# Altium PCB Amplificador.PcbDoc
Units mm, origin at the board's own origin, x right, y up, seen from the top; angles counter-clockwise.
Board outline 40 x 45 mm, 2 copper layers (Top Layer, Bottom Layer), stack 1.671 mm thick; 12 components, 6 nets, 39 pads, 5 vias.
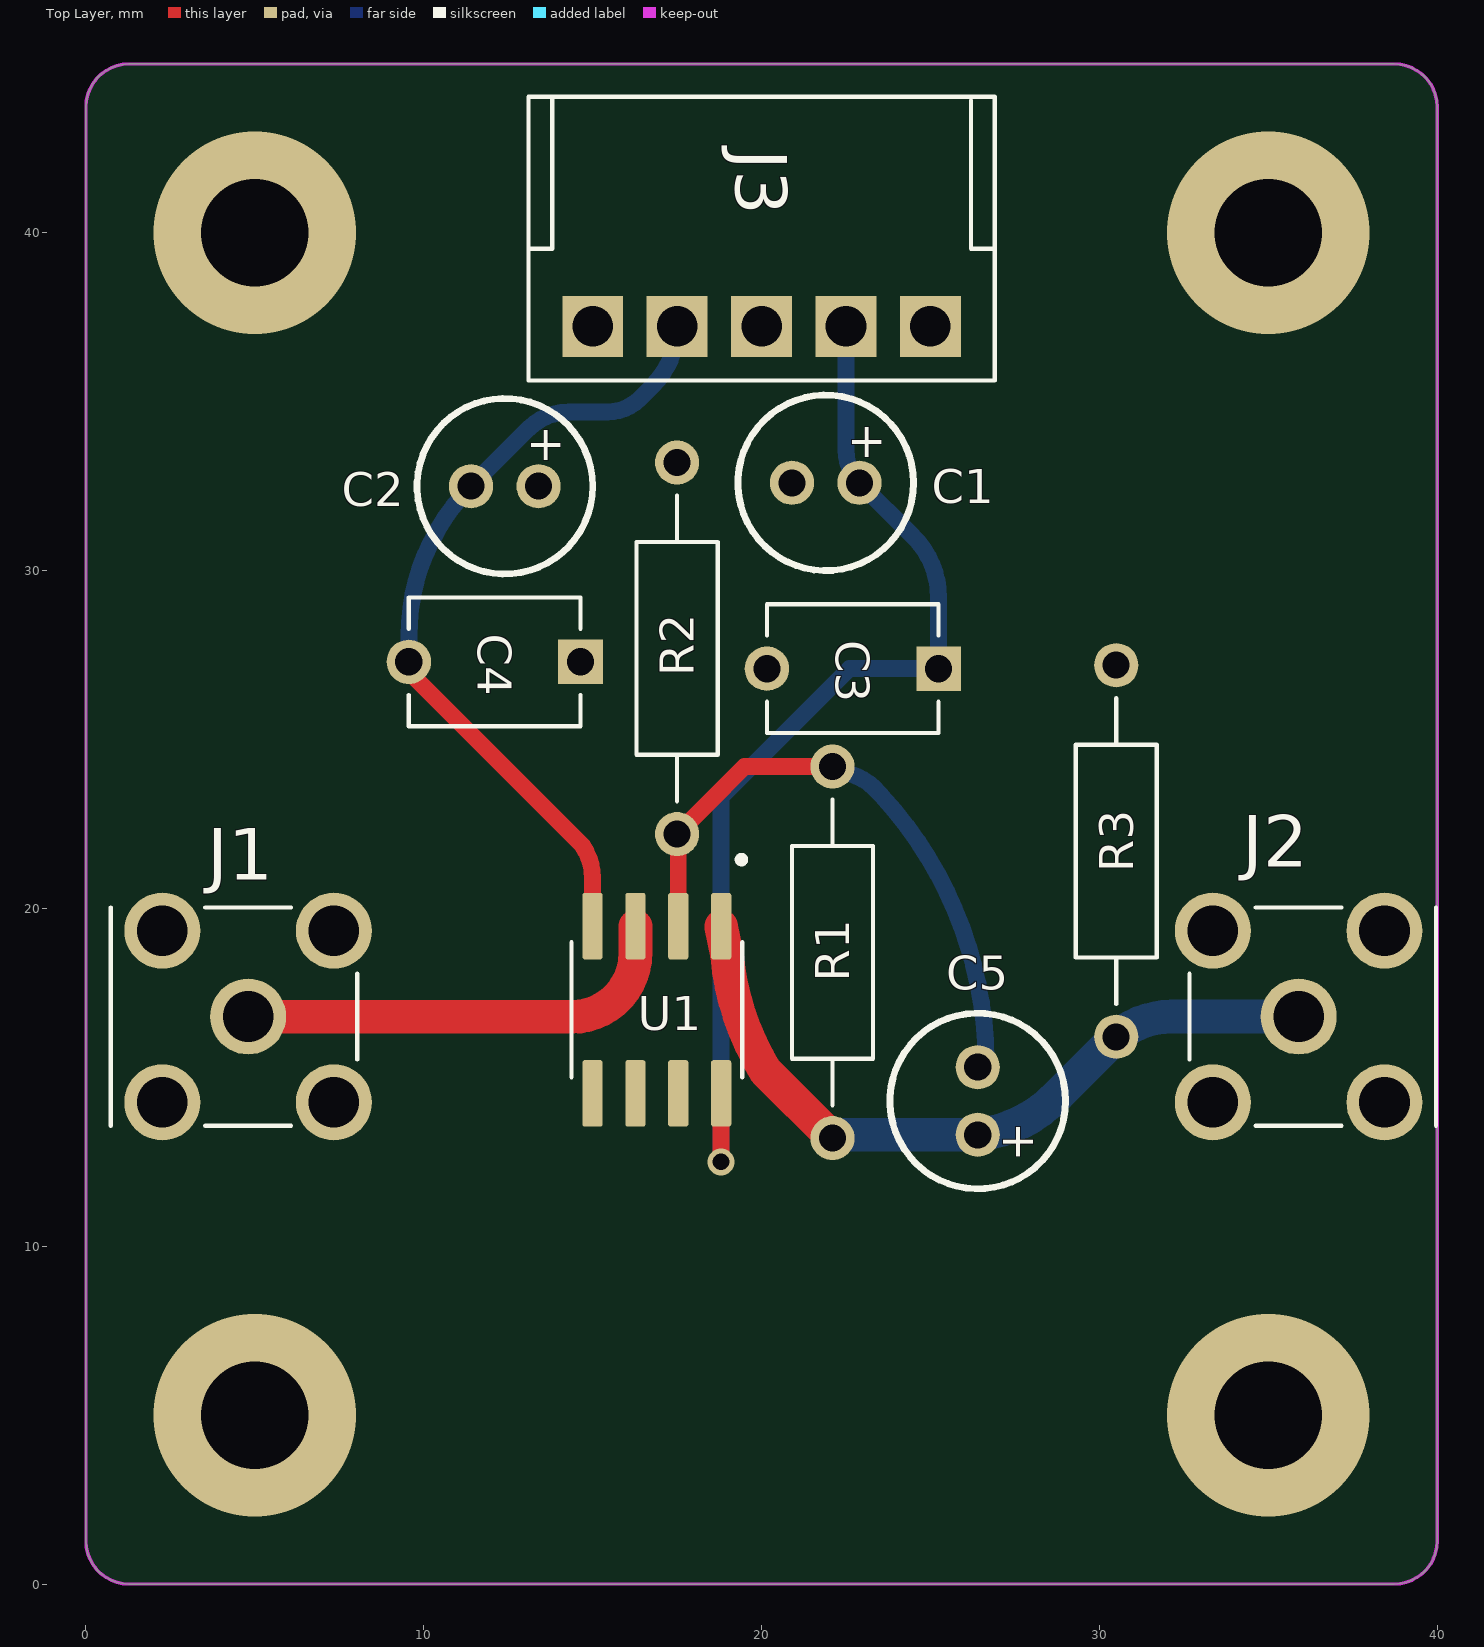
[diagram p0: Top Layer view]
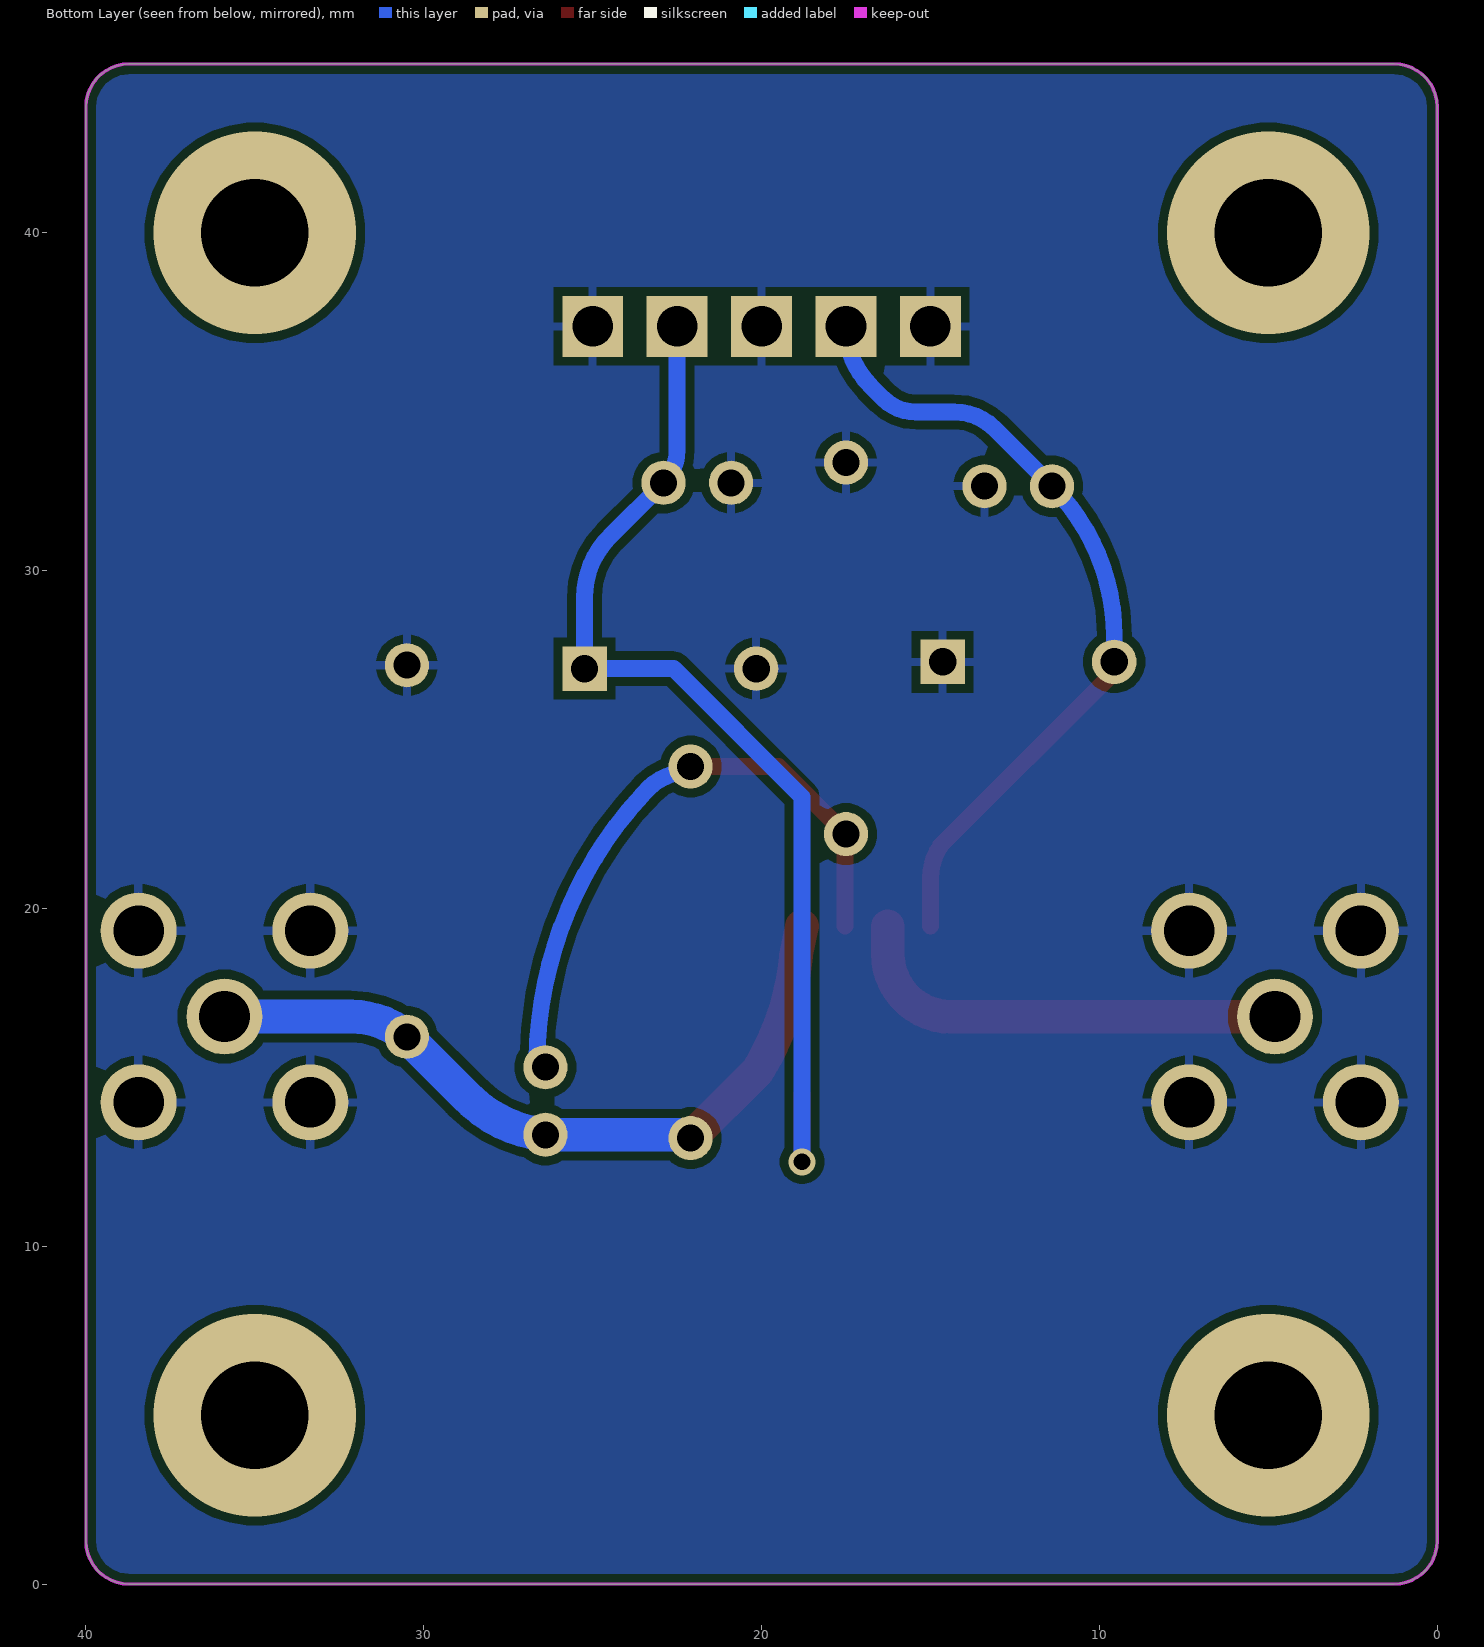
[diagram p1: Bottom Layer view, seen from below]
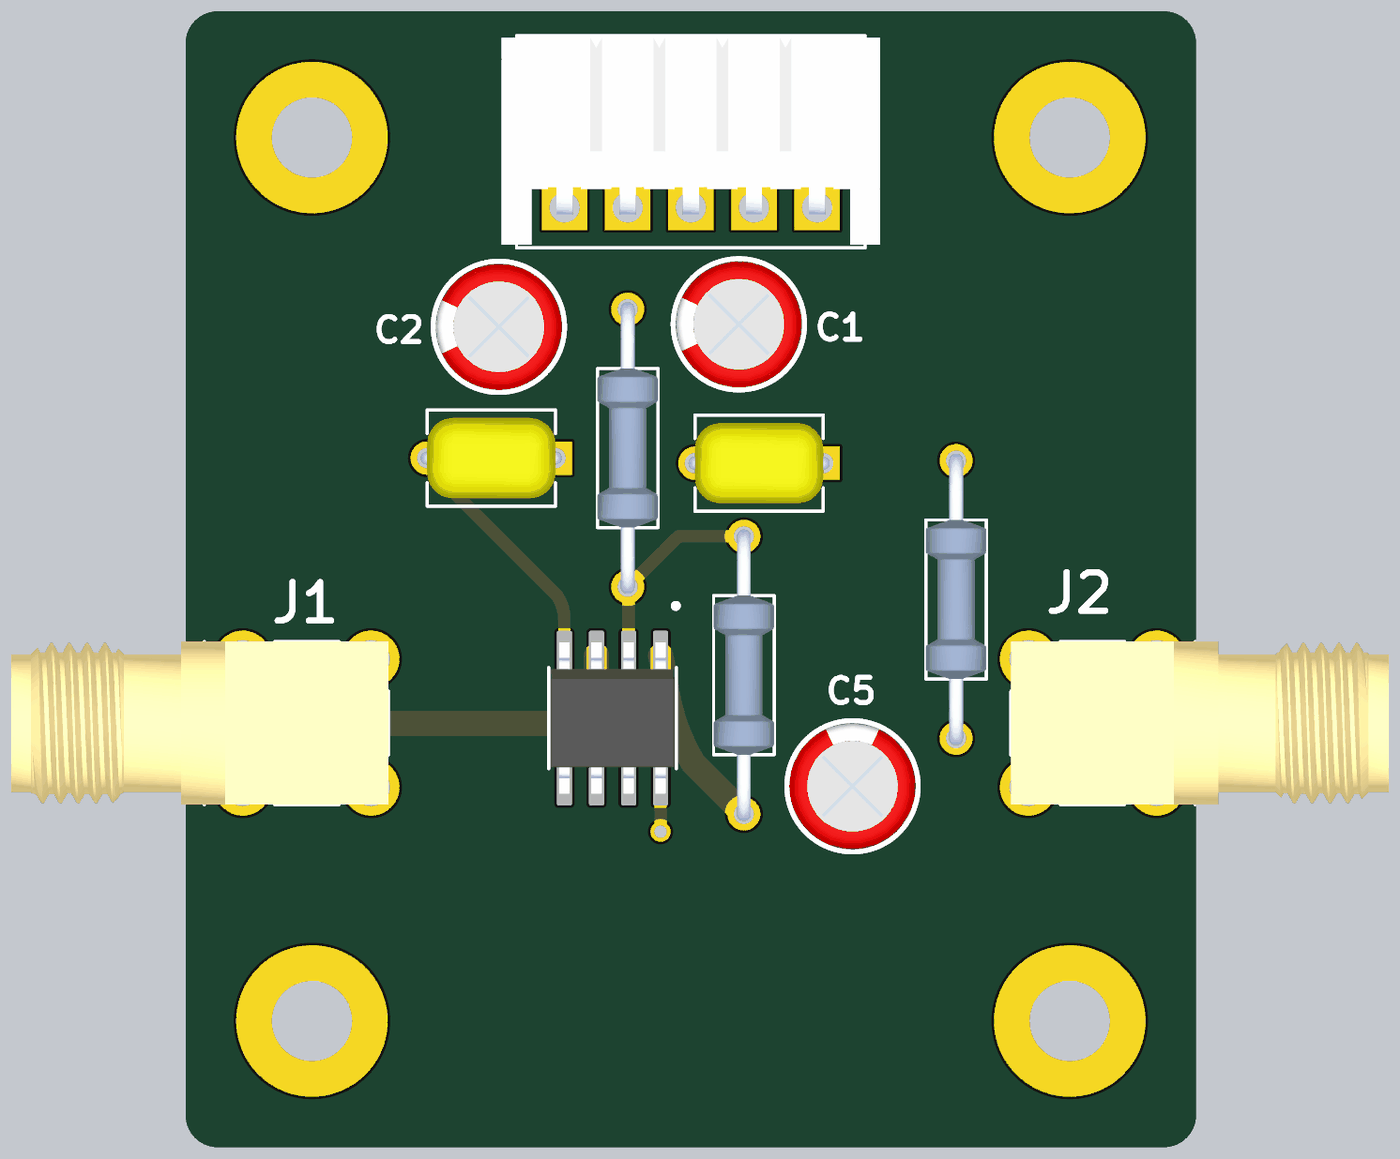
[diagram p2: 3D render of the assembled board from above, using the file's embedded part models]

## Layer stack, top to bottom
Top Solder: solder mask 0.0102, Solder Resist, Dk 3.5
Top Layer: signal copper 0.0356
Dielectric 1: dielectric 1.6, FR-4, Dk 4.2
Bottom Layer: signal copper 0.0356
Bottom Solder: solder mask 0.0102, Solder Resist, Dk 3.5

## Board outline
0,1.27 0,43.73 cw(c1.27,43.73) 1.27,45 38.73,45 cw(c38.73,43.73) 40,43.73 40,1.27 cw(c38.73,1.27) 38.73,0 1.27,0 cw(c1.27,1.27)

## Design rules (kind name [scope] priority, off if disabled: settings)
Clearance [All] p1: gap=0.254 ignorepadtopadclearanceinfootprint=FALSE
PolygonConnect ReliefAncho [IsPad And InPadClass('ReliefAncho')] p1: thpad.connectstyle=Relief thpad.reliefconductorwidth=0.254 thpad.reliefentries=4 thpad.polygonreliefangle="90 Angle" thpad.airgapwidth=0.254 smdpad.connectstyle=Relief smdpad.reliefconductorwidth=1.2 smdpad.reliefentries=4 smdpad.polygonreliefangle="90 Angle" smdpad.airgapwidth=0.3 via.connectstyle=Relief via.reliefconductorwidth=0.254 via.reliefentries=4 via.polygonreliefangle="90 Angle" via.airgapwidth=0.254
PolygonConnect DirectConnect [IsPad And InPadClass('DirectConnect')] p2: connectstyle=Direct reliefconductorwidth=0.254 reliefentries=4 polygonreliefangle="90 Angle" airgapwidth=0.254
PolygonConnect Vias_Shielding_DC [All vs InNet('GND')] p3: thpad.connectstyle=Relief thpad.reliefconductorwidth=0.254 thpad.reliefentries=4 thpad.polygonreliefangle="90 Angle" thpad.airgapwidth=0.254 smdpad.connectstyle=Relief smdpad.reliefconductorwidth=0.254 smdpad.reliefentries=4 smdpad.polygonreliefangle="90 Angle" smdpad.airgapwidth=0.254 via.connectstyle=Direct via.reliefconductorwidth=0.254 via.reliefentries=4 via.polygonreliefangle="90 Angle" via.airgapwidth=0.254
PolygonConnect [All] p4: connectstyle=Relief reliefconductorwidth=0.254 reliefentries=4 polygonreliefangle="90 Angle" airgapwidth=0.254
RoutingVias [All] p1: holewidth=0.711 width=1.27 viastyle="Through Hole" minholewidth=0.1 minwidth=0.1 maxholewidth=0.711 maxwidth=5
SolderMaskExpansion [All] p1: expansion=0.102 istentingtop=FALSE
SupplyNets "Schematic Supply Nets" [InNet('GND')] p1: voltage=0.000
Width [All] p1: maxlimit=10 minlimit=0.254 preferedwidth=0.254
30 further rules are at their usual default settings.

## Components (designator, comment, footprint, x,y, rotation, side; value= is the part's Value field where it differs from the comment)
C1 "10uF" WCAP-ATG5_5X11(DXL) 21.9,32.6 r0 top
C2 "10uF" WCAP-ATG5_5X11(DXL) 12.4,32.5 r0 top
C3 "10nF" CAPRR508W54L508T381H660 22.7,27.1 r180 top
C4 "10nF" CAPRR508W54L508T381H660 12.1,27.3 r180 top
C5 "10uF" WCAP-ATG5_5X11(DXL) 26.4,14.3 r270 top
J1 "F SMA" HUBER+SUHNER_85201239 4.8,16.8 r270 top
J2 "F SMA" HUBER+SUHNER_85201239 35.9,16.8 r90 top
J3 "S5B-EH" JST_S5B-EH 20,41 r180 top
R1 "10kΩ" RESAD1100W55L630D240B 22.1,18.7 r270 top
R2 "1kΩ" PCBComponent_1 17.5,27.7 r270 top
R3 "1kΩ" PCBComponent_1 30.5,21.7 r90 top
U1 "LT6201IS8#PBF" SOIC127P600X175-8N 16.9,17 r270 top

## Footprints (in the part's own frame and the unit in brackets; to place one, negate y for a bottom-side part, rotate by r counter-clockwise, add the part's x,y. Pads: shape width x height; smd on the part's side, far side on the other; paste and mask are expansions set on the pad)
CAPRR508W54L508T381H660 [mm]
  rect 1.318x1.318 / inner round 1.318 / far side rect 1.318x1.318 hole 0.81: 1(-2.54,0)
  round 1.318 hole 0.81: 2(2.54,0)
  silkscreen extent -2.54,-1.91 2.54,1.9, body extent -2.8,-1.59 2.8,1.59, height 6.6
HUBER+SUHNER_85201239 [mm]
  round 2.25 hole 1.5: 1(0,0) G1(-2.54,2.54) G2(2.54,2.54) G3(-2.54,-2.54) G4(2.54,-2.54)
  silkscreen extent -3.23,-4.06 3.23,3.23, body extent -3.23,-11.73 3.23,3.23, height 9.75
JST_S5B-EH [mm]
  rect 1.8x1.8 / inner round 1.8 / far side rect 1.8x1.8 hole 1.2 mask+0.102: 1(5,3.77) 2(2.5,3.77) 3(0,3.77) 4(-2.5,3.77) 5(-5,3.77)
  silkscreen extent -6.9,-3.03 6.9,5.37, body extent -7.5,-2.96 7.5,5.24, height 4.2
PCBComponent_1 [mm]
  round 1.308 hole 0.8: 1(-5.5,0) 2(5.5,0)
  silkscreen extent -4.53,-1.2 4.53,1.2, body extent -5.77,-1.2 5.77,1.2, height 2.39
RESAD1100W55L630D240B [mm]
  round 1.308 hole 0.8: 1(-5.5,0) 2(5.5,0)
  silkscreen extent -4.53,-1.2 4.53,1.2, body extent -5.77,-1.2 5.77,1.2, height 2.4
SOIC127P600X175-8N [mm]
  rrect25% 1.97x0.6 smd paste+0 mask+0.102: 1(-2.475,1.905) 2(-2.475,0.635) 3(-2.475,-0.635) 4(-2.475,-1.905) 5(2.475,-1.905) 6(2.475,-0.635) 7(2.475,0.635) 8(2.475,1.905)
  silkscreen extent -4.54,-2.52 2,2.6, body extent -3,-2.45 3,2.45, height 1.75
WCAP-ATG5_5X11(DXL) [mm]
  round 1.308 hole 0.8 mask+0.102: 1(1,0) 2(-1,0)
  silkscreen extent -2.6,-2.6 2.6,2.6, body extent -2.49,-2.5 2.5,2.5, height 11.01

## Part data
C1 C2 C5: library part WCAP-ATG5_5X11, "10 µF 25 V Aluminum Electrolytic Capacitors Radial, Can 2000 Hrs @ 105°C", ComponentLink1Description=Compra, ComponentLink1URL=https://www.digikey.com/en/products/detail/w%C3%BCrth-elektronik/860020472003/5727057, ID=860020472003
C3 C4: library part C322C103K5R5TA, "10000 pF ±10% 50V Ceramic Capacitor X7R Radial", ComponentLink1Description=Compra, ComponentLink1URL=https://www.digikey.com/en/products/detail/kemet/C322C103K5R5TA/818102, ID=C322C103K5R5TA
J1 J2: library part 85201239, "SMA Connector Jack, Female Socket 50 Ohms Through Hole, Right Angle Solder", Package=None, Check_prices=https://www.snapeda.com/parts/85_SMA-50-0-103/111_NE/Huber%252BSuhner/view-part/?ref=eda, MF=HUBER+SUHNER, MP=85_SMA-50-0-103/111_NE, SnapEDA_Link=https://www.snapeda.com/parts/85_SMA-50-0-103/111_NE/Huber%252BSuhner/view-part/?ref=snap
J3: "Connector Header Through Hole, Right Angle 5 position 0.098 (2.50mm)", Package=None, Check_prices=https://www.snapeda.com/parts/S5B-EH/JST/view-part/?ref=eda, MF="JST Sales", MP=S5B-EH, SnapEDA_Link=https://www.snapeda.com/parts/S5B-EH/JST/view-part/?ref=snap
R1: library part 10KOhms, "10 kOhms ±1% 0.5W, 1/2W Through Hole Resistor Axial Metal Film", ComponentLink1Description=Compra, ComponentLink1URL=https://www.digikey.com/en/products/detail/yageo/MFR50SFTE52-10K/9151037, ID=MFR50SFTE52-10K
R2 R3: library part MFR1WSFBE52-1K, "1 kOhms ±1% 1W Through Hole Resistor Axial Metal Film"
U1: "Buffer Amplifier 2 Circuit Rail-to-Rail 8-SO", ComponentLink1Description=Compra, ComponentLink1URL=https://www.digikey.com/en/products/detail/analog-devices-inc/LT6201IS8-PBF/961104, ID=LT6201IS8#PBF

## Via types
v1: diameter 6, hole 3.18, Top Layer to Bottom Layer, 4 vias
v2: diameter 0.8, hole 0.5, Top Layer to Bottom Layer, 1 vias

## Nets (pads, with @x,y where several pads share a name; then routed paths per layer and width w, separated by ;. In a path a pad name is that pad's centre, name@x,y a point inside that pad or via, vN(x,y) a via of type N, cw(c..) or ccw(c..) an arc to the next point about the centre after c; other vN are vias at no path point)
+4V: C1.1 C3.1 J3.4 U1.8 | length 31.9
  Top Layer w0.254: v2(18.8,12.5) v2@18.802,12.502 ; U1.8@18.802,14.522 U1.8
  Top Layer w0.5: v2@18.802,12.502 U1.8@18.802,14.522
  Bottom Layer w0.5: v2(18.8,12.5) 18.8,23.3 22.6,27.1 C3.1 25.24,29.208 ccw(c22.7,29.208) 24.496,31.004 C1.1 cw(c23.866,33.566) 22.5,33.566 J3.4
-4V: C2.2 C4.2 J3.2 U1.4 | length 24.1
  Top Layer w0.5: C4.2@9.56,27 14.698,21.862 cw(c13.305,20.905) 14.995,20.905 U1.4
  Bottom Layer w0.5: C4.2@9.56,27 C4.2 9.56,28.058 cw(c15.842,28.058) C2.2 13.105,34.205 cw(c14.3,33.01) 14.3,34.7 15.434,34.7 ccw(c15.434,36.066) 16.4,35.1 16.772,35.472 ccw(c15.013,37.23) J3.2
GND: C1.2 C2.1 C3.2 C4.1 J1.G1 J1.G2 J1.G3 J1.G4 J2.G1 J2.G2 J2.G3 J2.G4 J3.1 J3.3 J3.5 R2.1 R3.2
NetC5_2: C5.2 R1.1 R2.2 U1.2 | length 18.9
  Top Layer w0.5: R2.2@17.1,22.2 cw(c17.1,21.765) 17.535,21.765 U1.2 ; R2.2 18.356,23.056 19.5,24.2 R1.1
  Bottom Layer w0.5: R1.1@22.218,24.029 R1.1 22.81,23.914 cw(c22.216,22.438) 23.352,23.552 cw(c14.891,15.386) 23.559,23.332 cw(c14.891,15.386) C5.2@26.649,15.498
"Output signal": C5.1 J2.1 R1.2 R3.1 U1.1 | length 22.4
  Top Layer w1: U1.1 18.978,18.617 ccw(c26.825,19.315) 20.119,15.181 R1.2
  Bottom Layer w1: R1.2 22.2,13.3 C5.1 ccw(c25.976,17.153) 28.783,14.48 28.837,14.537 30.356,16.056 cw(c32.152,14.26) 32.152,16.8 J2.1
Signal: J1.1 U1.3 | length 13.3
  Top Layer w1: J1.1@4.8,16.791 14.391,16.791 ccw(c14.391,18.665) 16.265,18.665 U1.3
pads on no net: U1.5 U1.6 U1.7
copper on no net:
  other v1: 5,5 35,5 5,40 35,40

## Polygon pours and split planes (outlines as drawn)
GND on Bottom Layer "NONET_L-01_P-001" (solid, pour order 0): 0,1.27 0,43.73 cw(c1.27,43.73) 1.27,45 38.73,45 cw(c38.73,43.73) 40,43.73 40,1.27 cw(c38.73,1.27) 38.73,0 1.27,0 cw(c1.27,1.27)

## Keep-outs
Keep-Out Layer:
  lines w0.1: 0,1.27 ccw(c1.27,1.27) 1.27,0 4.8,0 38.73,0 ccw(c38.73,1.27) 40,1.27 40,43.73 ccw(c38.73,43.73) 38.73,45 1.27,45 ccw(c1.27,43.73) 0,43.73 0,1.27

## Text inside footprints (layer, text, board x,y; h text height)
C1: Top Overlay "+" at 22.535,33.362 h1.02
C2: Top Overlay "+" at 13.035,33.262 h1.02
C5: Top Overlay "+" at 27.162,13.665 h1.02 r270